# Altium PCB MainBoard.PcbDoc
Units mm, origin at the board's own origin, x right, y up, seen from the top; angles counter-clockwise.
Board outline 130 x 110.34 mm, 2 copper layers (Top Layer, Bottom Layer); 113 components, 175 nets, 489 pads, 0 vias.
Unrouted connection lines stored in the file: 266.
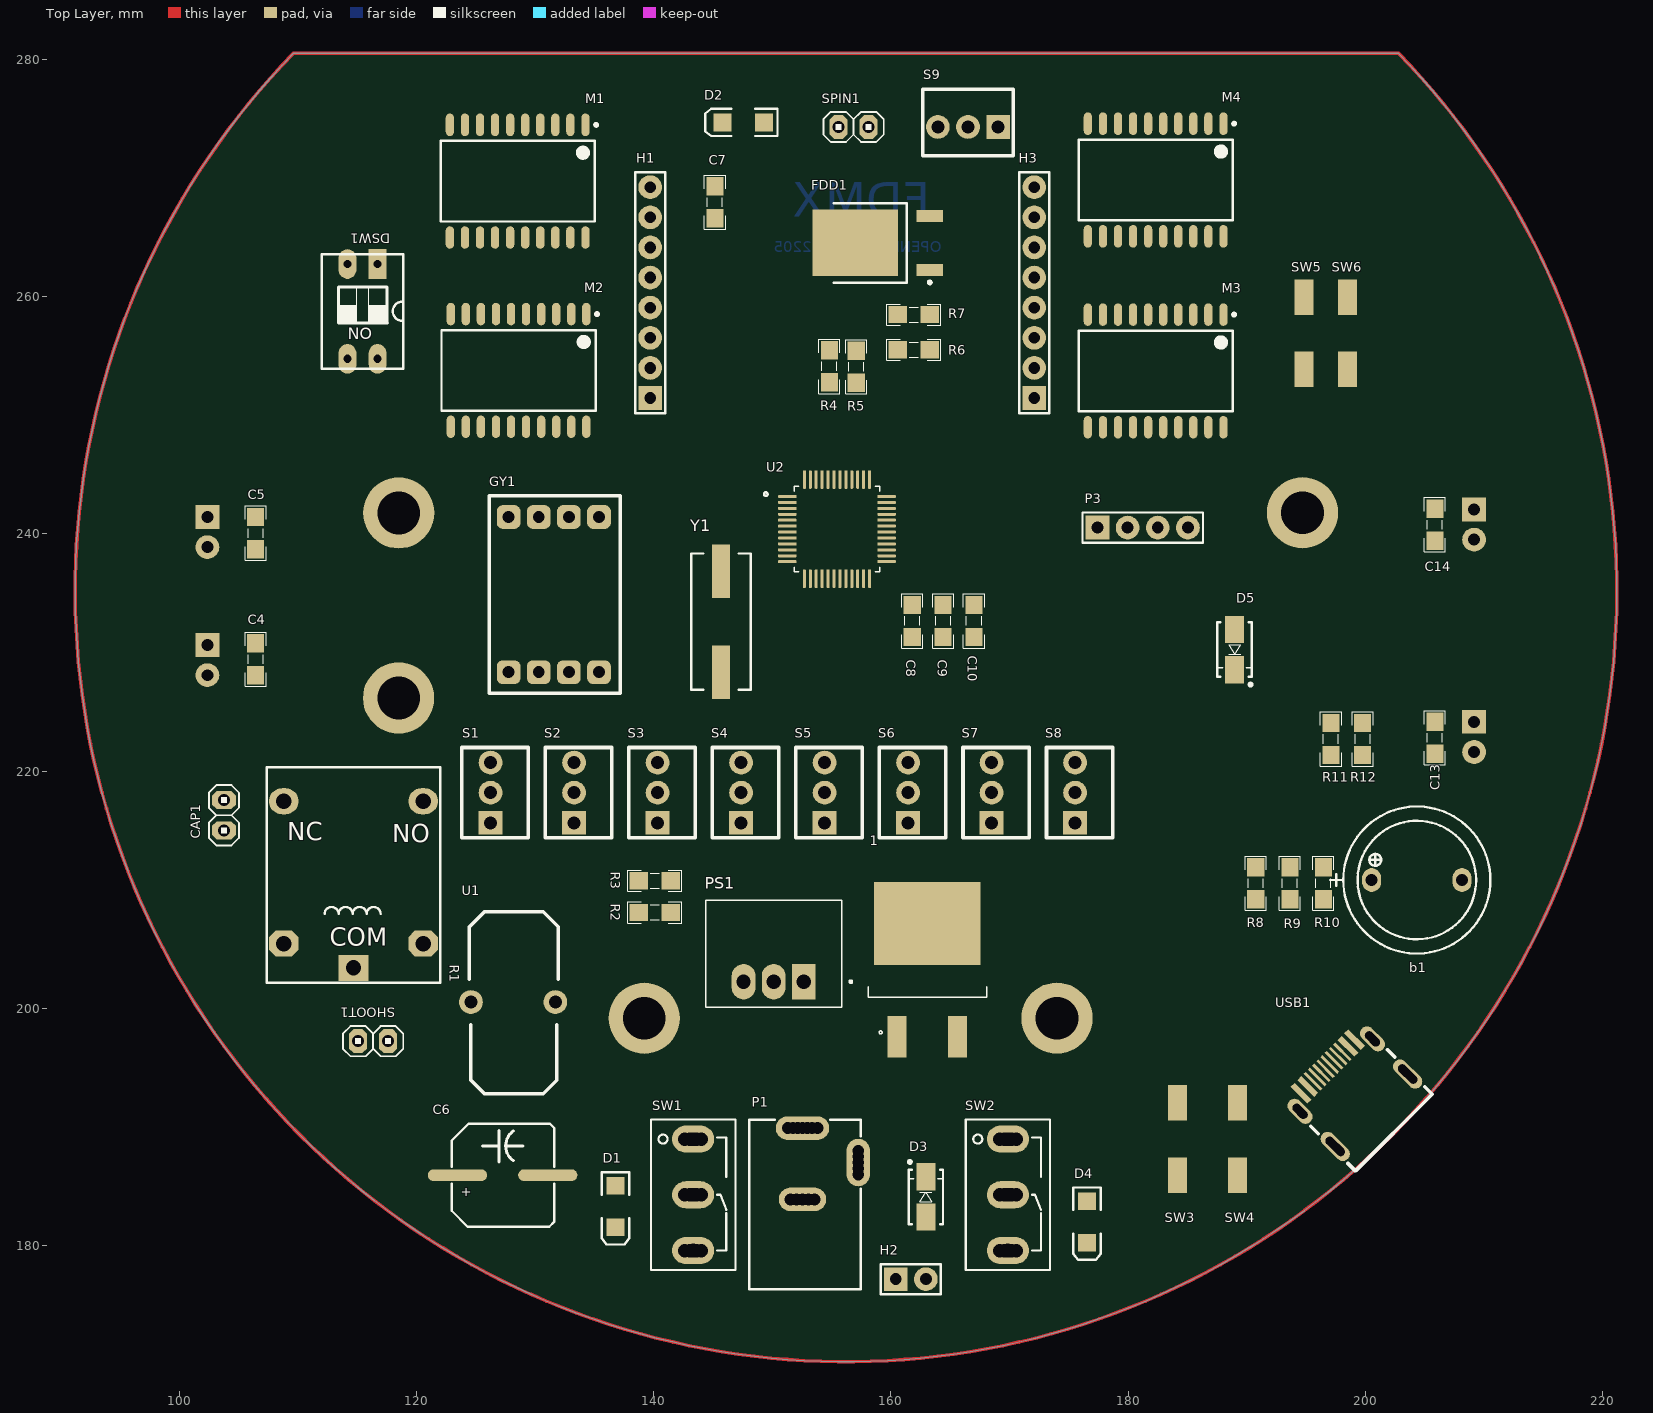
[diagram p0: Top Layer view]
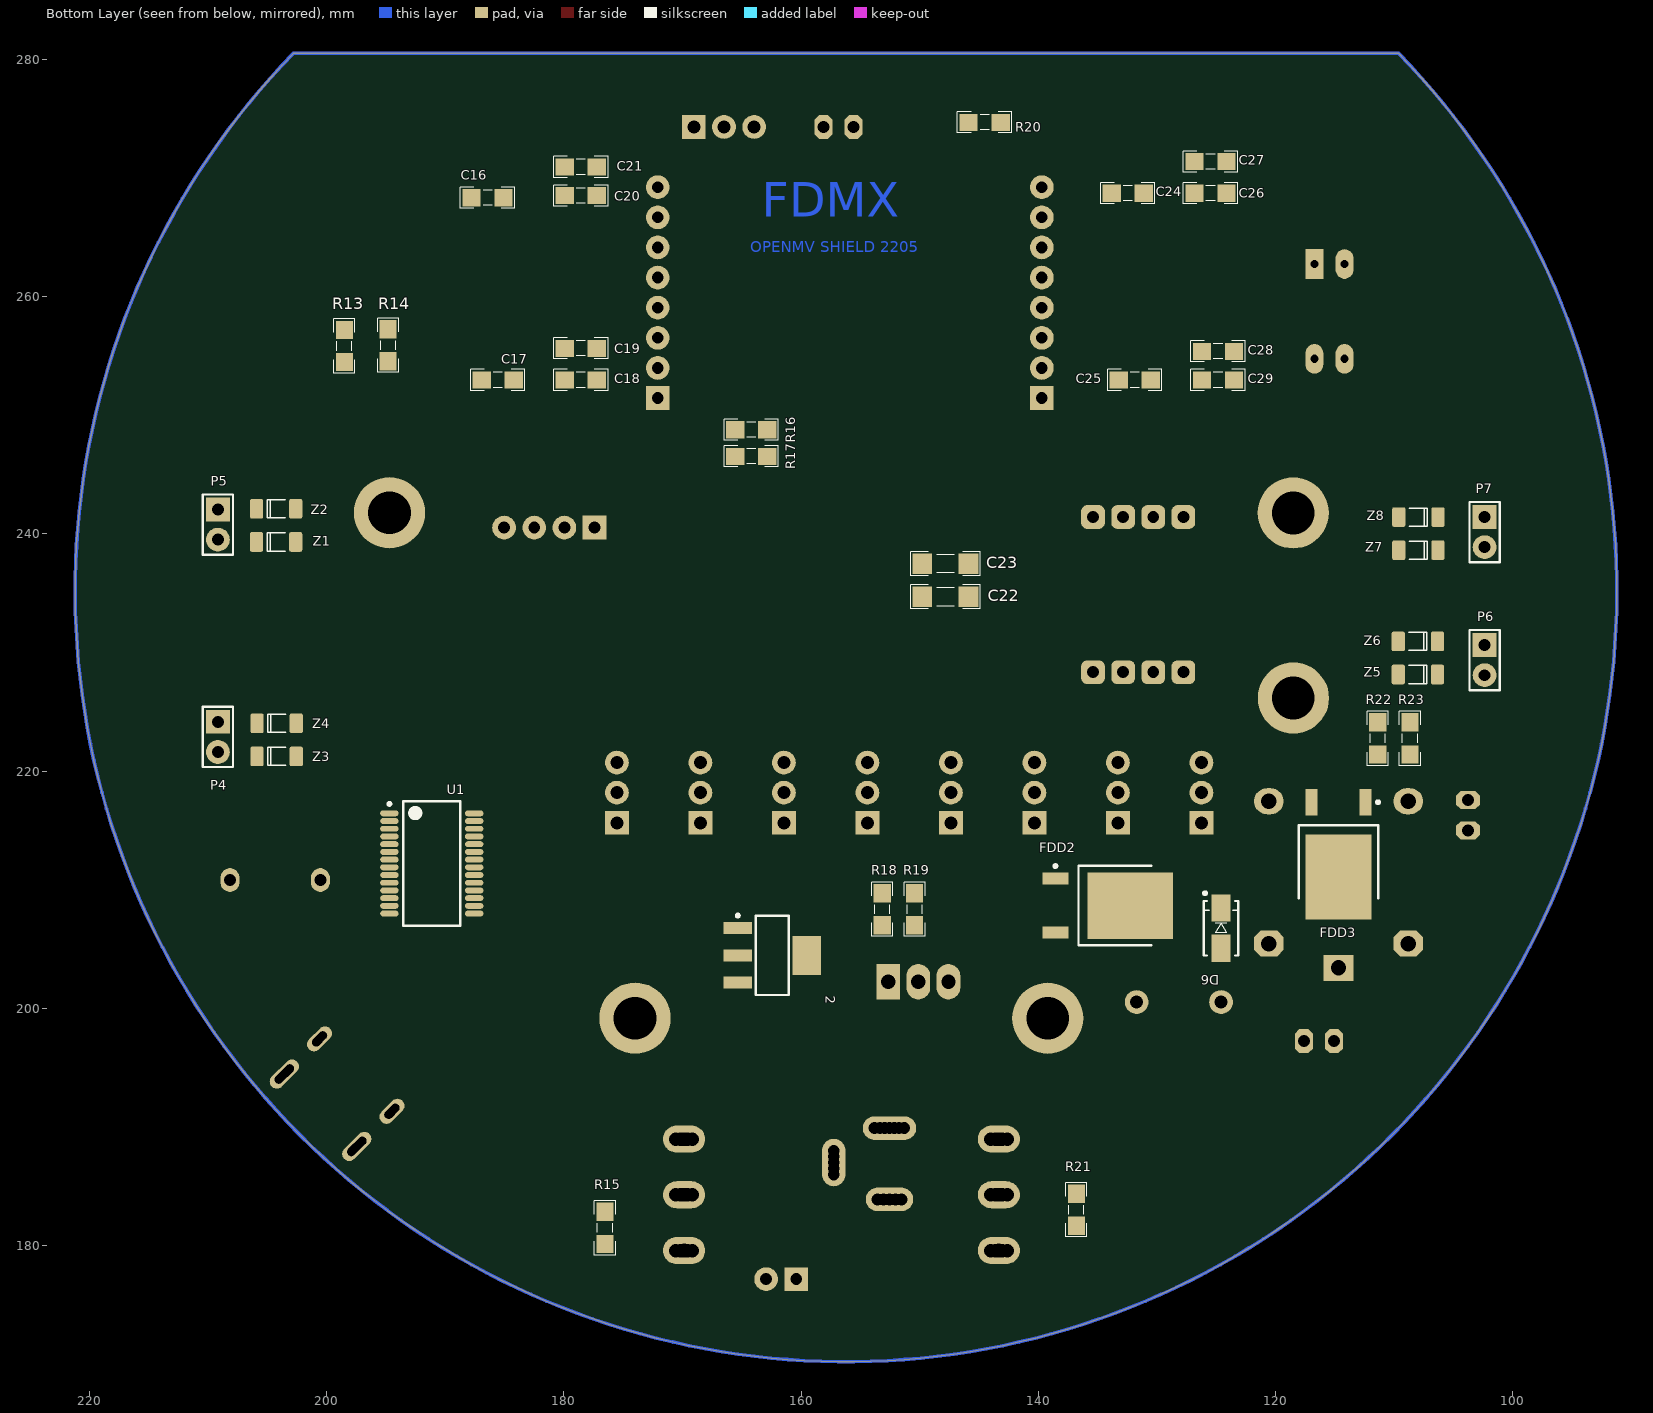
[diagram p1: Bottom Layer view, seen from below]

## Layer stack, top to bottom
Top Solder: solder mask 0.0102, Solder Resist, Dk 3.5
Top Layer: signal copper 0.0356
Dielectric 1: dielectric 0.32, FR-4, Dk 4.8
Bottom Layer: signal copper 0.0356
Bottom Solder: solder mask 0.0102, Solder Resist, Dk 3.5

## Board outline
109.618,280.527 ccw(c156.21,235.204) 202.804,280.525 202.819,280.543

## Design rules (kind name [scope] priority, off if disabled: settings)
Clearance [All] p1: gap=1 ignorepadtopadclearanceinfootprint=FALSE except(0.25: Arc-Arc Arc-Track Arc-SMDPad Track-Track Track-SMDPad SMDPad-SMDPad; 0.254: Arc-THPad Arc-Via Arc-Text Arc-Hole Track-THPad Track-Via Track-Text Track-Hole SMDPad-THPad SMDPad-Via SMDPad-Text SMDPad-Hole THPad-THPad THPad-Via THPad-Text THPad-Hole Via-Via Via-Text Via-Hole Text-Text Text-Hole; 0.5: Fill-Text Fill-Hole Poly-Text Poly-Hole Region-Text Region-Hole)
ComponentClearance [All] p1 off: gap=0.254 collisioncheckmode=3 verticalgap=0.254 showdistances=FALSE
Height [All] p1 off: minheight=0 maxheight=25.4 prefheight=12.7
PolygonConnect [All] p1: connectstyle=Direct reliefconductorwidth=0.254 reliefentries=4 polygonreliefangle="90 Angle" airgapwidth=0.254
RoutingVias [All] p1: holewidth=0.3 width=0.6 viastyle="Through Hole" minholewidth=0.25 minwidth=0.25 maxholewidth=1 maxwidth=1
SolderMaskExpansion [All] p1: expansion=0.102 istentingtop=FALSE
Width [All] p1: maxlimit=10 minlimit=0.25 preferedwidth=0.8
28 further rules are at their usual default settings.

## Components (designator, comment, footprint, x,y, rotation, side; value= is the part's Value field where it differs from the comment)
1 "" VREG_L7805ACD2T 163.068,204.324 r90 top
2 "Comment" SOT223_N 162.433,204.47 r180 bottom
b1 "Comment" "BUZZER 7.62mm DC" 204.343,210.82 r0 top
C1 "Comment" "MY_CAP_POL 10MM" 96.52,291.211 r0 top
C2 "Comment" "MY_CAP_POL 10MM" 100.711,302.006 r0 top
C3 "Comment" "MY_CAP_POL 10MM" 106.934,312.674 r0 top
C4 "Comment" CAPC3413X12N 106.426,229.442 r90 top
C5 "Comment" CAPC3413X12N 106.426,240.077 r90 top
C6 "Comment" "CAP SMD 470uF" 127.254,185.928 r180 top
C7 "Comment" CAPC3413X12N 145.161,267.97 r270 top
C8 "Comment" CAPC3413X12N 161.798,232.664 r90 top
C9 "Comment" CAPC3413X12N 164.401,232.664 r90 top
C10 "Comment" CAPC3413X12N 167.005,232.664 r90 top
C11 "Comment" "MY_CAP_POL 10MM" 199.39,315.595 r180 top
C12 "Comment" "MY_CAP_POL 10MM" 205.867,305.308 r180 top
C13 "Comment" CAPC3413X12N 205.867,222.805 r270 top
C14 "Comment" CAPC3413X12N 205.867,240.792 r270 top
C15 "Comment" "MY_CAP_POL 10MM" 210.716,294.152 r180 top
C16 "Comment" CAPC3413X12N 186.436,268.351 r0 bottom
C17 "Comment" CAPC3413X12N 185.575,252.984 r0 bottom
C18 "Comment" CAPC3413X12N 178.562,252.984 r180 bottom
C19 "Comment" CAPC3413X12N 178.562,255.651 r180 bottom
C20 "Comment" CAPC3413X12N 178.562,268.531 r180 bottom
C21 "Comment" CAPC3413X12N 178.562,270.944 r180 bottom
C22 "0.1uF" CAPC4817X12N 147.828,234.696 r0 bottom (schematic designator C12)
C23 "0.1uF" CAPC4817X12N 147.828,237.49 r0 bottom (schematic designator C11)
C24 "Comment" CAPC3413X12N 132.461,268.732 r0 bottom
C25 "Comment" CAPC3413X12N 131.854,252.984 r0 bottom
C26 "Comment" CAPC3413X12N 125.476,268.732 r180 bottom
C27 "Comment" CAPC3413X12N 125.476,271.399 r180 bottom
C28 "Comment" CAPC3413X12N 124.841,255.397 r180 bottom
C29 "Comment" CAPC3413X12N 124.841,252.984 r180 bottom
CAP1 "Comment" My_1X02 103.759,217.551 r90 top
D1 "SMD 1206 LED" "LED 1206" 136.779,183.289 r270 top (schematic designator D2)
D2 "SMD 1206 LED" "LED 1206" 147.537,274.706 r180 top
D3 "1n4007" DIOM4629X24N 162.941,184.101 r90 top
D4 "SMD 1206 LED" "LED 1206" 176.53,181.991 r270 top (schematic designator D2)
D5 "1n4007" DIOM4629X24N 188.976,230.251 r270 top
D6 "1n4007" DIOM4629X24N 124.587,206.756 r90 bottom (schematic designator D3)
DSW1 "Comment" "DIP Switch x2" 116.713,262.763 r180 top
FDD1 "Comment" TO252-3M 158.875,264.541 r180 top
FDD2 "Comment" TO252-3M 134.157,208.667 r180 bottom locked
FDD3 "Comment" TO252-3M 114.681,212.979 r270 bottom
GY1 "Comment" GY25 117.729,246.126 r270 top
H1 "Comment" HDR1X8 139.7,251.46 r90 top locked
H2 "Comment" HDR1X2 160.401,177.165 r0 top
H3 "Comment" HDR1X8 172.085,251.46 r90 top locked
M1 "Comment" L6201 128.524,269.748 r270 top
M2 "Comment" L6201 128.599,253.789 r270 top
M3 "Comment" L6201 182.32,253.746 r270 top
M4 "Comment" L6201 182.32,269.844 r270 top
P1 "Comment" "DC Power Jack 1" 151.743,189.896 r90 top
P3 "Header 4" HDR1X4 177.419,240.538 r0 top (schematic designator P6)
P4 "Header 2" HDR1X2 209.169,224.155 r270 bottom
P5 "Header 2" HDR1X2 209.169,242.062 r270 bottom (schematic designator P4)
P6 "Header 2" HDR1X2 102.362,230.632 r270 bottom (schematic designator P4)
P7 "Header 2" HDR1X2 102.362,241.427 r270 bottom (schematic designator P4)
PS1 "K7805-2000R3" CONV_K7805-2000R3 150.114,204.597 r180 top
R1 "Comment" "Relay 18.85x15.35x15.70" 114.681,210.439 r0 top
R2 "Comment" RESC3413X04N 140.081,208.085 r180 top
R3 "Comment" RESC3413X04N 140.081,210.752 r180 top
R4 "Comment" RESC3413X04N 154.813,254.127 r270 top
R5 "Comment" RESC3413X04N 157.066,254.105 r270 top
R6 "Comment" RESC3413X04N 161.925,255.536 r180 top
R7 "Comment" RESC3413X04N 161.925,258.496 r180 top
R8 "Comment" RESC3413X04N 190.768,210.544 r270 top
R9 "Comment" RESC3413X04N 193.642,210.544 r270 top
R10 "1K" RESC3413X04N 196.469,210.544 r90 top (schematic designator R22)
R11 "1K" RESC3413X04N 197.102,222.711 r270 top (schematic designator R34)
R12 "1K" RESC3413X04N 199.771,222.711 r270 top (schematic designator R35)
R13 "1K" RESC3413X04N 198.501,255.848 r270 bottom (schematic designator R24)
R14 "1K" RESC3413X04N 194.818,255.905 r270 bottom (schematic designator R23)
R15 "1K" RESC3413X04N 176.53,181.483 r270 bottom (schematic designator R22)
R16 "Comment" RESC3413X04N 164.211,248.793 r180 bottom
R17 "Comment" RESC3413X04N 164.189,246.54 r180 bottom
R18 "Comment" RESC3413X04N 153.155,208.348 r270 bottom
R19 "Comment" RESC3413X04N 150.429,208.348 r270 bottom
R20 "1K" RESC3413X04N 144.526,274.701 r0 bottom (schematic designator R22)
R21 "1K" RESC3413X04N 136.779,183.007 r270 bottom (schematic designator R22)
R22 "Comment" RESC3413X04N 111.379,222.758 r270 bottom
R23 "Comment" RESC3413X04N 108.653,222.758 r270 bottom
S1 "Comment" "H3 MOLEX" 126.238,218.186 r90 top
S2 "Comment" "H3 MOLEX" 133.279,218.186 r90 top
S3 "Comment" "H3 MOLEX" 140.321,218.186 r90 top
S4 "Comment" "H3 MOLEX" 147.362,218.186 r90 top
S5 "Comment" "H3 MOLEX" 154.404,218.186 r90 top
S6 "Comment" "H3 MOLEX" 161.445,218.186 r90 top
S7 "Comment" "H3 MOLEX" 168.487,218.186 r90 top
S8 "Comment" "H3 MOLEX" 175.528,218.186 r90 top
S9 "Comment" "H3 MOLEX" 166.497,274.32 r180 top
SHOOT1 "Comment" My_1X02 117.602,197.231 r0 top
SPIN1 "Comment" My_1X02 155.575,274.32 r180 top
SW1 "Comment" "Switch SPDT - 500x270x1100x185 mil" 143.321,184.278 r0 top
SW2 "Comment" "Switch SPDT - 500x270x1100x185 mil" 169.864,184.278 r0 top
SW3 "Comment" SMD_ALPS_SKQMBBE010#1 184.15,188.976 r270 top
SW4 "Comment" SMD_ALPS_SKQMBBE010#2 189.26,188.976 r270 top
SW5 "Comment" SMD_ALPS_SKQMBBE010#1 194.818,256.921 r90 top
SW6 "Comment" SMD_ALPS_SKQMBBE010#1 198.501,256.921 r90 top
U1 "Comment" FT232RL 191.135,212.217 r180 bottom
U1 "Comment" inductor 128.143,200.66 r0 top
U2 "STM32F103C8T6" QFP50P900X900X160-48N 155.448,240.411 r0 top locked (schematic designator U5)
U3 "Comment" "OLED SH1106" 259.842,253.873 r0 top
U5 "TDAxis12" TDAxis12 236.271,225.934 r180 top locked (schematic designator U2)
USB1 "Comment" "USB Type C 12pin" 198.628,193.294 r225 top
Y1 "12 MHz" "Crystal SMD" 145.669,232.605 r90 top
Z1 "Comment" "SOD80, LL-34" 204.259,239.325 r180 bottom
Z2 "Comment" "SOD80, LL-34" 204.259,242.114 r180 bottom
Z3 "Comment" "SOD80, LL-34" 204.216,221.239 r180 bottom
Z4 "Comment" "SOD80, LL-34" 204.216,224.028 r180 bottom
Z5 "Comment" "SOD80, LL-34" 107.993,228.149 r0 bottom
Z6 "Comment" "SOD80, LL-34" 107.993,230.938 r0 bottom
Z7 "Comment" "SOD80, LL-34" 107.95,238.638 r0 bottom
Z8 "Comment" "SOD80, LL-34" 107.95,241.427 r0 bottom

## Footprints (in the part's own frame and the unit in brackets; to place one, negate y for a bottom-side part, rotate by r counter-clockwise, add the part's x,y. Pads: shape width x height; smd on the part's side, far side on the other; paste and mask are expansions set on the pad)
"BUZZER 7.62mm DC" [mm] "BUZZER 12mm DIA , 7.62mm pitch DESIGNER ABBAS BASEREH"
  oval 1.6x2 hole 1: 1(-3.81,0) 2(3.81,0)
  silkscreen extent -7.3,-6.2 6.2,6.2, body extent -6,-6 6,6, height 9.5
"CAP SMD 470uF" [mm] "SMD CAP 470uF"
  oval 5x1 smd: 1(3.81,0) 2(-3.81,0)
  silkscreen extent -4.37,-4.34 4.29,4.34, body extent -4.53,-4.15 4.47,4.15, height 12
CAPC3413X12N [mm] "Chip Capacitor, 2-Leads, Body 3/40x1/30mm, IPC Medium Density-Design:Abbas Basereh"
  rect 1.55x1.45 smd: 1(-1.35,0) 2(1.35,0)
  silkscreen extent -2.29,-0.89 2.29,0.89, body extent -1,-0.62 1,0.63, height 0.78
CAPC4817X12N [mm] "Chip Capacitor, 2-Leads, Body 4/80x1/70mm, IPC Medium Density-Design:Abbas Basereh"
  rect 1.65x1.75 smd: 1(-1.95,0) 2(1.95,0)
  silkscreen extent -2.92,-1.02 2.92,1.02, body extent -1.6,-0.8 1.6,0.8, height 1
CONV_K7805-2000R3 [mm]
  rect 2x3 hole 1.2: 1(-2.54,2.35)
  oval 2x3 hole 1.2: 2(0,2.35) 3(2.54,2.35)
  silkscreen extent -6.6,-4.5 5.75,4.5, body extent -5.75,-4.5 5.75,4.5, height 17.5
"Crystal SMD" [mm] "DESIGNER ABBAS BASEREH"
  rect 4.5x1.5 smd: 1(-4.25,0) 2(4.25,0)
  silkscreen extent -5.75,-2.5 5.75,2.5, body extent -6.21,-2.25 6.09,2.25, height 5.18
"DC Power Jack 1" [mm] "Power Adaptor Jack"
  round 1.5 hole 1: 1(0,0.45) 1(0,0) 1(0,-0.4) 1(0,-1.2) 1(0,-1.6) 1(0,-2.05) 2(-6,-1.8) 2(-6,0.2) 2(-6,-1.3) 2(-6,-0.3) 3(-3.9,-5.5) 3(-3.4,-5.5) 3(-2.4,-5.5) 3(-1.9,-5.5)
  oval 2x4.5 hole 1: 1(0,-0.8)
  oval 2x4 hole 1: 2(-6,-0.8)
  oval 4x2 hole 1: 3(-2.9,-5.5)
  silkscreen extent -13.59,-5.7 0.7,3.7, body extent -13.68,-5.74 0.72,3.66, height 11.05
DIOM4629X24N [mm] "Molded Diode, 2-Leads, Body 4/60x2/90mm, IPC Medium Density-Design:Abbas Basereh"
  rect 2.3x1.6 smd: 1(-1.7,0) 2(1.7,0)
  silkscreen extent -2.3,-1.45 3.07,1.47, body extent -2.5,-1.22 2.5,1.48, height 2.2
"DIP Switch x2" [mm] "Switch DIP 2 way flat slide Thru-Hole-Design:Ali Hafizi"
  rect 1.5x2.5 hole 0.7: 1(0,0)
  oval 1.5x2.5 hole 0.7: 2(2.54,0) 3(2.54,8) 4(0,8)
  silkscreen extent -2.16,-0.82 4.71,8.83, body extent -1.98,-1.03 4.52,8.97, height 6.91
FT232RL [mm] "SOP, 28-Leads, Body 10.28x5.30mm, Pitch 0.65mm, IPC Medium Density"
  oval 1.55x0.5 smd: 1(-3.575,4.225) 2(-3.575,3.575) 3(-3.575,2.925) 4(-3.575,2.275) 5(-3.575,1.625) 6(-3.575,0.975) 7(-3.575,0.325) 8(-3.575,-0.325) 9(-3.575,-0.975) 10(-3.575,-1.625) 11(-3.575,-2.275) 12(-3.575,-2.925) 13(-3.575,-3.575) 14(-3.575,-4.225) 15(3.575,-4.225) 16(3.575,-3.575) 17(3.575,-2.925) 18(3.575,-2.275) 19(3.575,-1.625) 20(3.575,-0.975) 21(3.575,-0.325) 22(3.575,0.325) 23(3.575,0.975) 24(3.575,1.625) 25(3.575,2.275) 26(3.575,2.925) 27(3.575,3.575) 28(3.575,4.225)
  silkscreen extent -3.7,-5.25 2.4,5.25, body extent -3.89,-5.25 3.89,5.25, height 2
GY25 [mm]
  rrect50% 2x2 hole 1: 1(4.699,17.653) 2(4.699,15.113) 3(4.699,12.573) 4(4.699,10.033) 5(17.78,10.033) 6(17.78,12.573) 7(17.78,15.113) 8(17.78,17.653)
  silkscreen extent 2.92,8.38 19.56,19.43
"H3 MOLEX" [mm]
  rect 2x2 hole 1.1: 1(-2.54,0)
  round 2 hole 1.1: 2(0,0) 3(2.54,0)
  silkscreen extent -3.81,-3.18 3.81,2.41, body extent -3.81,-3.31 3.81,2.49, height 11.25
HDR1X2 [mm] "Connector; Header; 2 Position"
  rect 2x2 hole 1: 1(0,0)
  round 2 hole 1: 2(2.54,0)
  silkscreen extent -1.27,-1.27 3.81,1.27
HDR1X4 [mm] "Connector; Header; 4 Position"
  rect 2x2 hole 1: 1(0,0)
  round 2 hole 1: 2(2.54,0) 3(5.08,0) 4(7.62,0)
  silkscreen extent -1.27,-1.27 8.89,1.27, body extent -1.27,-1.28 8.89,1.26, height 8.38
HDR1X8 [mm] "Connector; Header; 8 Position"
  rect 2x2 hole 1: 1(0,0)
  round 2 hole 1: 2(2.54,0) 3(5.08,0) 4(7.62,0) 5(10.16,0) 6(12.7,0) 7(15.24,0) 8(17.78,0)
  silkscreen extent -1.27,-1.27 19.05,1.27
inductor [mm]
  round 2 hole 1.1: 1(-3.556,-0.127) 2(3.556,-0.127)
  silkscreen extent -3.68,-7.87 3.81,7.49, body extent -4.15,-8.42 4.15,8.17, height 16.29
L6201 [mm] "SOP, 20-Leads, Body 12.80x7.50mm, Pitch 1.27mm, IPC Medium Density"
  oval 1.9x0.7 smd: 1(-4.75,5.715) 2(-4.75,4.445) 3(-4.75,3.175) 4(-4.75,1.905) 5(-4.75,0.635) 6(-4.75,-0.635) 7(-4.75,-1.905) 8(-4.75,-3.175) 9(-4.75,-4.445) 10(-4.75,-5.715) 11(4.75,-5.715) 12(4.75,-4.445) 13(4.75,-3.175) 14(4.75,-1.905) 15(4.75,-0.635) 16(4.75,0.635) 17(4.75,1.905) 18(4.75,3.175) 19(4.75,4.445) 20(4.75,5.715)
  silkscreen extent -4.87,-6.5 3.4,6.74, body extent -5.16,-6.5 5.16,6.5, height 2.5
"LED 1206" [mm]
  rect 1.5x1.5 smd: 1(-1.75,0) 2(1.75,0)
  silkscreen extent -2.9,-1.15 3.2,1.15, body extent -1.65,-0.72 1.65,0.73, height 1.36
My_1X02 [mil]
  oct 60x80 hole 40: 1(-100,0) 2(0,0)
  silkscreen extent -150,-50 50,50, body extent -149,-51 51,49, height 234
"MY_CAP_POL 10MM" [mm]
  round 2 hole 1: +(-2.517,0.02) -(2.517,-0.02)
  silkscreen extent -5.09,-5 4.89,4.98, body extent -5.13,-5.07 5.03,5.09, height 10.16
"OLED SH1106" [mm]
  oval 2.2x2.6 hole 1.2: 1(-3.81,15.748) 2(-1.27,15.748) 3(1.27,15.748) 4(3.81,15.748)
  round 6 hole 3.5: ""(-15.367,14.224) ""(-15.365,-14.23) ""(15.367,14.224)
  silkscreen extent -18.67,-17.53 18.67,17.53, body extent -18,-17 18,17, height 7.6
QFP50P900X900X160-48N [mm]
  rrect50% 1.56x0.25 smd: 1(-4.18,2.75) 2(-4.18,2.25) 3(-4.18,1.75) 4(-4.18,1.25) 5(-4.18,0.75) 6(-4.18,0.25) 7(-4.18,-0.25) 8(-4.18,-0.75) 9(-4.18,-1.25) 10(-4.18,-1.75) 11(-4.18,-2.25) 12(-4.18,-2.75) 25(4.18,-2.75) 26(4.18,-2.25) 27(4.18,-1.75) 28(4.18,-1.25) 29(4.18,-0.75) 30(4.18,-0.25) 31(4.18,0.25) 32(4.18,0.75) 33(4.18,1.25) 34(4.18,1.75) 35(4.18,2.25) 36(4.18,2.75)
  rrect50% 0.25x1.56 smd: 13(-2.75,-4.18) 14(-2.25,-4.18) 15(-1.75,-4.18) 16(-1.25,-4.18) 17(-0.75,-4.18) 18(-0.25,-4.18) 19(0.25,-4.18) 20(0.75,-4.18) 21(1.25,-4.18) 22(1.75,-4.18) 23(2.25,-4.18) 24(2.75,-4.18) 37(2.75,4.18) 38(2.25,4.18) 39(1.75,4.18) 40(1.25,4.18) 41(0.75,4.18) 42(0.25,4.18) 43(-0.25,4.18) 44(-0.75,4.18) 45(-1.25,4.18) 46(-1.75,4.18) 47(-2.25,4.18) 48(-2.75,4.18)
  silkscreen extent -6.15,-3.6 3.6,3.6
"Relay 18.85x15.35x15.70" [mm]
  rect 2.5x2.2 hole 1.3: 1(0,-7.025)
  oval 2.5x2.2 hole 1.3: 2(-5.875,7.025) 3(5.875,7.025)
  oct 2.5x2.2 hole 1.3: 4(-5.875,-4.975) 5(5.875,-4.975)
  silkscreen extent -7.33,-8.27 7.33,9.88, body extent -7.37,-8.72 7.63,9.98, height 15.7
RESC3413X04N [mm] "Chip Resistor, 2-Leads, Body 3/40x1/30mm, IPC Medium Density-Design:Abbas Basereh"
  rect 1.55x1.45 smd: 1(-1.35,0) 2(1.35,0)
  silkscreen extent -2.29,-0.89 2.29,0.89, body extent -1.25,-0.62 1.25,0.62, height 0.79
SMD_ALPS_SKQMBBE010#1 [mm] "Vertical 6.0X3.5 mm Compact Type (SurfaceMount) SKQM Series ; Height 5.0 mm ; 50,000 Cycles ; 1.57N Force"
  rect 3x1.6 smd mask-1.27: 1(-3.048,0) 2(3.048,0)
  body extent -3.15,-1.75 3.15,1.75, height 5.03
SMD_ALPS_SKQMBBE010#2 [mm] "Vertical 6.0X3.5 mm Compact Type (SurfaceMount) SKQM Series ; Height 5.0 mm ; 50,000 Cycles ; 1.57N Force"
  rect 3x1.6 smd mask-1.27: 1(-3.048,-0.03) 2(3.048,-0.03)
  body extent -3.15,-1.75 3.15,1.75, height 5.03
"SOD80, LL-34" [mm] "Diode, MiniMELF"
  round 0.5 on Mech15: 0(0,0)
  rrect25% 1.1x1.65 smd: 1(1.65,0) 2(-1.65,0)
  silkscreen extent -0.76,-0.76 0.76,0.76, body extent -1.88,-0.8 1.82,0.8, height 1.6
SOT223_N [mm] "SOT223, 4-Leads, Body 6.5x3.5mm, Pitch 2.3mm, Lead Span 7mm, IPC Medium Density"
  rect 2.4x1 smd: 1(-2.9,2.3) 2(-2.9,0) 3(-2.9,-2.3)
  rect 2.4x3.3 smd: 4(2.9,0)
  silkscreen extent -3.03,-3.35 1.4,3.47, body extent -1.85,-3.35 1.85,3.35, height 1.7
"Switch SPDT - 500x270x1100x185 mil" [mil]
  round 40 hole 45: 1(-27.56,-185.04) 1(-11.81,-185.04) 1(11.81,-185.04) 1(27.56,-185.04) 2(-27.56,0) 2(-11.81,0) 2(11.81,0) 2(27.56,0) 3(-27.56,185.04) 3(-11.81,185.04) 3(11.81,185.04) 3(27.56,185.04)
  oval 140x90 hole 45: 1(0,-185) 2(0,0) 3(0,185)
  silkscreen extent -140,-250 140,250, body extent -134,-250 136,250, height 1127
TDAxis12 [mm] "Connector; Header; 7 Position"
  oval 1.6x2 hole 1 mask+0.1: 1(-7.62,-0.075) 2(-5.08,-0.075) 3(-2.54,-0.075) 4(0,-0.075) 5(2.54,-0.075) 6(5.08,-0.075) 7(7.62,-0.075)
  silkscreen extent -10.5,-2.35 10.5,23.5, body extent -10.5,-1.5 10.5,23.5, height 5.34
TO252-3M [mm] "D-PAK, 3-Pads, Body 6.2x6.7mm (max), IPC Low Density"
  rect 2.2x1 smd: 1(-4.4,2.28) 3(-4.4,-2.28)
  rect 7.2x5.6 smd: 4(1.9,0)
  silkscreen extent -4.52,-3.35 3.7,3.45, body extent -5.06,-3.27 4.88,3.27, height 2.39
"USB Type C 12pin" [mm]
  rect 0.5x2 smd: 1(-3.204,-2.543) 2(-2.413,-2.543) 11(2.387,-2.543) 12(3.186,-2.543)
  rect 0.25x2 smd: 3(-1.747,-2.543) 4(-1.246,-2.543) 5(-0.746,-2.543) 6(-0.246,-2.543) 7(0.255,-2.543) 8(0.755,-2.543) 9(1.255,-2.543) 10(1.755,-2.543)
  oval 1.2x2.5 hole 0.7 slot 1.5 at 90 deg: 13(4.318,-1.524) 16(-4.318,-1.524)
  oval 1.2x3 hole 0.7 slot 2 at 90 deg: 14(4.318,2.667) 15(-4.318,2.667)
  silkscreen extent -4.57,0 4.57,5.33, body extent -4.6,-2.62 4.6,5.33, height 3.2
VREG_L7805ACD2T [mm]
  rect 3.5x1.6 smd: 1(-6.7,2.54) 3(-6.7,-2.54)
  rect 7x9 smd paste-7: 4(2.813,0)
  silkscreen extent -6.48,-5 -2.51,5, body extent -7.71,-5.1 7.71,5.1, height 4.6

## Part data
C22 C23: library part "CAP SMD 1206", "CAP 1206", Data=16-12-2016, Desc.="CAP SMD 1206", Designer="Abbas Basereh"
D1 D2 D4: library part "LED SMD 1206"
D3 D5 D6: library part "1n4007 SMD M7", "Standard Rectifiers", Manufacturer="DC COMPONENTS", Data=16-12-2016, Designer="Abbas Basereh", Link=http://www.tme.eu/en/details/m7/smd-universal-diodes/dc-components/, Part. No=M7
P3: "Header, 4-Pin", LatestRevisionDate=17-Jul-2002, LatestRevisionNote="Re-released for DXP Platform.", Publisher="Altium Limited"
P4 P5 P6 P7: "Header, 2-Pin", LatestRevisionDate=17-Jul-2002, LatestRevisionNote="Re-released for DXP Platform.", Publisher="Altium Limited"
PS1: "éžçµ¶ç¸åž‹ PoL ãƒ¢ã‚¸ãƒ¥ãƒ¼ãƒ« DC DC ã‚³ãƒ³ãƒãƒ¼ã‚¿ 1 å‡ºåŠ› 5V 2A 8V - 36V å…¥åŠ›", Package="SIP-3-3 MORNSUN", Check_prices=https://www.snapeda.com/parts/K7805-2000R3/MORNSUN/view-part/5366399/?ref=eda, Digi-Key_Part_Number=2725-K7805-2000R3-ND, MF="Mornsun America, LLC", MP=K7805-2000R3, SnapEDA_Link=https://www.snapeda.com/parts/K7805-2000R3/MORNSUN/view-part/5366399/?ref=snap
R10 R11 R12 R13 R14 R15 R20 R21: library part "RES 0805 0.125W", "RES 0805", Data=16-12-2016, Desc.="RES SMD 0805", Designer="Abbas Basereh"
U2: "Mainstream Performance line, ARM Cortex-M3 MCU with 64 Kbytes Flash, 72 MHz CPU, motor control, USB and CAN", Package=None, Availability=Unavailable, MP=STM32F103C8T6, Price=None
U5: "Module, 12 Axis IMU, I2C UART Output"
Y1: library part XTAL, "XTAL Crystal", ComponentLink1Description=Datasheet, ComponentLink2Description=Reference, Design Date=2017-1-3, Designer="ABBAS BASEREH", Mounting Technology="Surface Mount\Through-Hole", Status=Unreleased

## Free pads (board coordinates)
  round 6 hole 3.6 mask+0.1: 2(118.487,226.167) 2(118.499,241.771) 2(139.2,199.158) 2(174,199.174) 2(194.704,241.784)

## Nets (pads, with @x,y where several pads share a name; then routed paths per layer and width w, separated by ;. In a path a pad name is that pad's centre, name@x,y a point inside that pad or via, vN(x,y) a via of type N, cw(c..) or ccw(c..) an arc to the next point about the centre after c; other vN are vias at no path point)
3.3V: 
5V: 1.3 2.3 C6.1 C7.2 H1.7 PS1.3 R1.4
12V: 1.1 PS1.1 SW2.3
+3.3V: 
+5: U5.1
ADC0: S1.3 U2.10
ADC1: S2.3 U2.11
ADC2: S3.3 U2.12
ADC3: S4.3 U2.13
ADC4: S5.3 U2.14
ADC5: S6.3 U2.15
ADC6: S7.3 U2.16
ADC7: S8.3 U2.17
ADC8: S9.1 U2.18
ADC9: R18.1 R19.1 U2.19
ADC10: 
ADC11: 
ADC12: 
ADC13: 
ADC14: 
ADC15: 
ADCOUT: 
ADD0: 
ADD1: 
ADD2: 
ADD3: 
"AIR MIX MA +": 
"AIR MIX MA -": 
b11: C26.1 M1.12
b12: C29.1 M2.12
b13: C20.1 M4.12
b14: C18.1 M3.12
b21: C27.1 M1.19
b22: C28.1 M2.19
b23: C21.1 M4.19
b24: C19.1 M3.19
BAT_Volt: 
BOOST_CTRL: R3.1 U2.46
BOOT0: R14.2 SW5.1 U2.44
buz: b1.1 R10.1
Buzzer: R10.2 U2.32
DIP1: DSW1.4 R5.2 U2.40
DIP2: DSW1.3 R4.2 U2.41
DIPSW1: 
DIPSW2: 
ENA_1: 
ENA_2: 
ENA_3: 
ENA_4: 
ENB_1: 
ENB_2: 
ENB_3: 
ENB_4: 
GATE: FDD1.1 R6.1 R7.1
GATE_BOOST: FDD2.1 R2.2 R3.2
GATE_RELAY: FDD3.1 R22.2 R23.2
GND: 1.4 2.1 b1.2 C1.- C2.- C3.- C6.2 C7.1 C8.1 C9.1 C10.1 C11.- C12.- C15.- C16.1 C17.1 C22.2 C23.2 C24.1 C25.1 CAP1.2 FDD1.3 FDD2.3 FDD3.3 GY1.4 H1.8 H2.1 M1.1 M1.4 M1.5 M1.6 M1.7 M1.14 M1.15 M1.16 M1.17 M2.1 M2.4 M2.5 M2.6 M2.7 M2.14 M2.15 M2.16 M2.17 M3.1 M3.4 M3.5 M3.6 M3.7 M3.14 M3.15 M3.16 M3.17 M4.1 M4.4 M4.5 M4.6 M4.7 M4.14 M4.15 M4.16 M4.17 P1.2 P3.1 PS1.2 R2.1 R4.1 R5.1 R6.2 R14.1 R15.1 R17.2 R18.2 R20.1 R21.1 R23.1 S1.1 S2.1 S3.1 S4.1 S5.1 S6.1 S7.1 S8.1 S9.3 SHOOT1.1 SW6.2 U2.8 U2.23 U2.35 U2.47 U3.2 U5.2 USB1.13 USB1.14 USB1.15 USB1.16 Z1.1 Z2.1 Z3.1 Z4.1 Z5.1 Z6.1 Z7.1 Z8.1
I2C_SCL: 
I2C_SDA: 
ID: R16.1 R17.1 U2.33
INA1: M1.13 U2.28
INA2: M2.13 U2.27
INA3: M4.13 U2.26
INA4: M3.13 U2.25
INA_1: 
INA_2: 
INA_3: 
INA_4: 
INB1: 
INB2: 
INB3: 
INB4: 
INB_1: 
INB_2: 
INB_3: 
INB_4: 
Inductor: D6.1 FDD2.4 U1.1@124.587,200.533
LED1: D1.2 R21.2
LED2: D4.2 R15.2
LED3: D2.1 U2.2
LED3_RES: D2.2 R20.2
LED4: 
LED5: 
M1: FDD1.4 SPIN1.2
MA1: 
MA2: 
MA3: 
MA4: 
MB1: 
MB2: 
MB3: 
MB4: 
"MODE MA +": 
"MODE MA -": 
MOTOR: 
MOTORS_EN: 
NetD5_1: D5.1 P3.4
NetRES2_1: U5.7
NRST: R13.2 SW6.1 U2.7
OSC_IN: C23.1 U2.5 Y1.2
OSC_OUT: C22.1 U2.6 Y1.1
OUT_1A: C5.1 C26.2 M1.11 P7.2 Z7.2
OUT_1B: C5.2 C27.2 M1.9 P7.1 Z8.2
OUT_2A: C4.1 C29.2 M2.11 P6.2 Z5.2
OUT_2B: C4.2 C28.2 M2.9 P6.1 Z6.2
OUT_3A: C14.1 C20.2 M4.11 P5.1 Z2.2
OUT_3B: C14.2 C21.2 M4.9 P5.2 Z1.2
OUT_4A: C13.1 C18.2 M3.11 P4.1 Z4.2
OUT_4B: C13.2 C19.2 M3.9 P4.2 Z3.2
PWM1: M1.18 U2.43
PWM2: M2.18 U2.45
PWM3: M4.18 U2.42
PWM4: M3.18 U2.29
PWM_1: 
PWM_2: 
PWM_3: 
PWM_4: 
RELAY: FDD3.4 R1.5
RELAY_CTRL: 
RES1: 
RES2: 
RES3: 
RES4: 
RES5: 
RX: GY1.3 U2.31
RX2: 
S3: 
S4: 
S5: 
S6: 
S7: 
S8: 
S9: 
S10: 
S11: 
S12: 
S13: 
S14: 
S15: 
SCL: H3.5 R11.1 U2.21 U3.3
"SCL TD 12": U5.5
SDA: H3.6 R12.1 U2.22 U3.4
"SDA TD 12": U5.6
SHIFT5: 
shoot: R22.1 U2.4
spin: R7.2 U2.3
SW1: R8.1 U2.38
SW2: R9.1 U2.39
SW3: 
SW4: 
SW5: 
SWCLK: P3.2 U2.37
SWDIO: P3.3 U2.34
SWR1: 
SWR2: R9.2 SW4.1
SWR3: R8.2 SW3.1
SWR4: 
SWR5: 
TX: GY1.2 U2.30
TX2: 
UART1_RX: 
UART1_TX: 
UART2_RX: 
UART2_TX: 
VBat: D3.1 H2.2 P1.1
VBOOST: CAP1.1 D6.2 R1.3
VCC: 2.2 2.4 C8.2 C9.2 C10.2 D4.1 D5.2 DSW1.1 DSW1.2 GY1.1 M1.2 M2.2 M3.2 M4.2 R11.2 R12.2 R13.1 R16.2 S1.2 S2.2 S3.2 S4.2 S5.2 S6.2 S7.2 S8.2 S9.2 SW3.2 SW4.2 SW5.2 U2.9 U2.24 U2.36 U2.48 U3.1
VIN: D3.2 SW1.2 SW2.2
VP: 
VREF1: C24.2 M1.20
VREF2: C25.2 M2.20
VREF3: C16.2 M4.20
VREF4: C17.2 M3.20
VSHOOT: R1.1 SHOOT1.2
VSS: C1.+ C2.+ C3.+ C11.+ C12.+ C15.+ D1.1 M1.10 M2.10 M3.10 M4.10 R19.2 SPIN1.1 SW1.3 U1.2@131.699,200.533
pads on no net: GY1.5 GY1.6 GY1.7 GY1.8 H1.1 H1.2 H1.3 H1.4 H1.5 H1.6 H3.1 H3.2 H3.3 H3.4 H3.7 H3.8 M1.3 M1.8 M2.3 M2.8 M3.3 M3.8 M4.3 M4.8 P1.3 R1.2 SW1.1 SW2.1 U1.1@194.71,216.442 U1.2@194.71,215.792 U1.3 U1.4 U1.5 U1.6 U1.7 U1.8 U1.9 U1.10 U1.11 U1.12 U1.13 U1.14 U1.15 U1.16 U1.17 U1.18 U1.19 U1.20 U1.21 U1.22 U1.23 U1.24 U1.25 U1.26 U1.27 U1.28 U2.1 U2.20 U3. U5.3 U5.4 USB1.1 USB1.2 USB1.3 USB1.4 USB1.5 USB1.6 USB1.7 USB1.8 USB1.9 USB1.10 USB1.11 USB1.12 Z1.0 Z2.0 Z3.0 Z4.0 Z5.0 Z6.0 Z7.0 Z8.0
copper on no net: | length 847.2
  Top Layer w0.3: 109.601,280.543 202.819,280.543 ; 109.618,280.527 ccw(c156.21,235.204) 202.804,280.525
  Bottom Layer w0.254: 170.307,47.752 170.307,48.26 ; 171.831,47.498 170.307,48.006 ; 171.831,48.514 170.307,48.006 ; 192.446,48.006 170.307,48.006 ; 208.239,48.006 230.378,48.006 ; 228.854,47.498 230.378,48.006 ; 228.854,48.514 230.378,48.006 ; 230.378,47.752 230.378,48.26
  Bottom Layer w0.3: 109.601,280.543 202.819,280.543 ; 109.618,280.527 ccw(c156.21,235.204) 202.804,280.525

## Polygon pours and split planes (outlines as drawn)
GND on Top Layer "NONET_L01_P000" (solid, shelved, pour order 0): 109.618,280.527 ccw(c156.21,235.204) 202.804,280.525 202.819,280.543
GND on Bottom Layer "NONET_L02_P001" (solid, shelved, pour order 1): 109.618,280.527 ccw(c156.21,235.204) 202.804,280.525 202.819,280.543

## Other copper
Bottom Layer:
  text "FDMX" at 163.294,265.795 h5
  text "OPENMV SHIELD 2205" at 164.277,263.42 h1.6
  text "60.071 (mm)" at 192.7,47.092 h1.52

## Silkscreen, mask and mechanical layers (free items; w line width, h text height)
Mechanical 1:
  lines w0.3: 109.601,280.543 202.819,280.543 ; 109.618,280.527 ccw(c156.21,235.204) 202.804,280.525

## Text inside footprints (layer, text, board x,y; h text height)
C1: Top Overlay "-" at 99.767,290.458 h0.8
C2: Top Overlay "-" at 103.958,301.253 h0.8
C3: Top Overlay "-" at 110.181,311.921 h0.8
C6: Top Overlay "+" at 124.654,184.828 h0.8 r180
C11: Top Overlay "-" at 196.143,316.348 h0.8 r180
C12: Top Overlay "-" at 202.62,306.061 h0.8 r180
C15: Top Overlay "-" at 207.469,294.906 h0.8 r180
DSW1: Top Overlay "ON" at 116.273,257.403 h1 r180
R1: Top Overlay "COM" at 112.7,205.257 h1.5; Top Overlay "NO" at 117.932,213.995 h1.5; Top Overlay "NC" at 109.093,214.173 h1.5
U3: Top Overlay "OLED SH1106" at 255.329,237.162 h0.8; Top Overlay "SDA" at 262.927,266.8 h0.5; Top Overlay "SCL" at 260.387,266.8 h0.5; Top Overlay "GND" at 257.847,266.8 h0.5; Top Overlay "VCC" at 255.307,266.8 h0.5